# EAGLE board LiPo Drop Charger v.4 -- Dual MCP73831T (EAGLE 6.4)

Size 100 x 80 mm. Coordinates in mm from the lower left corner, seen from the top.
Outline: 0,0 100,0 100,80 0,80 0,0
Copper layers (1*16): Top 0.035mm / dielectric 1.5mm / Bottom 0.035mm
Design rules "default": minimum track width 10mil, minimum drill 24mil, track to track 8mil, track to pad 8mil, pad to pad 8mil, via to via 8mil, smd to smd 8mil, copper to edge 40mil, drill to drill 8mil, minimum pad ring 10mil, minimum via ring 8mil, stop-mask expansion 4mil, vias tented up to drill 0mil, thermal gap 10mil

## Footprints (pad centres in the part's own frame; a part is rotated, then mirrored left to right if it is on the bottom)
1X01 = drill 1.016 pad 1.88: 1 0,0
0805 = smd 0.8 x 1.2: 1 -0.9,0; 2 0.9,0
CHIP-LED0603 = smd 0.8 x 0.8: A 0,-0.75; C 0,0.75
SOT23-3 = smd 0.8 x 0.9: 1 -0.95,-1; 2 0.95,-1; 3 0,1.1
SOT23-5 = smd 0.55 x 1.2: 1 -0.95,-1.3; 2 0,-1.3; 3 0.95,-1.3; 4 0.95,1.3; 5 -0.95,1.3
SOT-23 = smd 1 x 1.27: 1 -0.95,-1; 2 0.95,-1; 3 0,1

## Placement (x,y rotation side)
5V  M01PTH  [1X01]  -19.05,19.05 0 top  (outside the outline)
AI  M01PTH  [1X01]  -27.94,19.05 0 top  (outside the outline)
BAT1+  M01PTH  [1X01]  -40.64,3.81 0 top  (outside the outline)
BAT1-  M01PTH  [1X01]  -29.21,11.43 0 top  (outside the outline)
BAT2+  M01PTH  [1X01]  -20.32,11.43 0 top  (outside the outline)
BAT2-  M01PTH  [1X01]  -38.1,11.43 0 top  (outside the outline)
C1  1uF  [0805]  -15.24,36.83 0 top  (outside the outline)
C2  1uF  [0805]  -19.05,36.83 0 top  (outside the outline)
C3  1uF  [0805]  -22.86,36.83 0 top  (outside the outline)
C4  1uF  [0805]  -26.67,36.83 0 top  (outside the outline)
GND  M01PTH  [1X01]  -36.83,19.05 0 top  (outside the outline)
LED1  [CHIP-LED0603]  -22.86,24.13 0 top  (outside the outline)
LED3  [CHIP-LED0603]  -26.67,24.13 0 top  (outside the outline)
LOAD+  M01PTH  [1X01]  -21.59,3.81 0 top  (outside the outline)
LOAD-  M01PTH  [1X01]  -31.75,3.81 0 top  (outside the outline)
Q1  ZXMN3F30FH  [SOT23-3]  -40.64,24.13 0 top  (outside the outline)
R1  330  [0805]  -30.48,36.83 0 top  (outside the outline)
R2  330  [0805]  -34.29,36.83 0 top  (outside the outline)
R3  4.7  [0805]  -38.1,36.83 0 top  (outside the outline)
R6  100k  [0805]  -41.91,36.83 0 top  (outside the outline)
R8  2K  [0805]  -15.24,40.64 0 top  (outside the outline)
R9  2K  [0805]  -19.05,40.64 0 top  (outside the outline)
R10  1k  [0805]  -22.86,40.64 0 top  (outside the outline)
U1  MCP73831  [SOT23-5]  -31.75,25.4 0 top  (outside the outline)
U2  MCP73831  [SOT23-5]  -35.56,25.4 0 top  (outside the outline)
U$1  DMP1045U  [SOT-23]  13.97,21.59 0 top
U$3  DMP1045U  [SOT-23]  -34.29,33.02 0 top  (outside the outline)
U$4  DMP1045U  [SOT-23]  6.35,34.29 0 top
UCG  M01PTH  [1X01]  -19.05,26.67 0 top  (outside the outline)

## Library data of the parts
5V AI BAT1+ BAT1- BAT2+ BAT2- C1-C4 GND LOAD+ LOAD- Q1 R1-R3 R6 R8-R10 U1 U2 UCG = SparkFun
LED1 LED3 = led
U$1 U$3 U$4 = zak

## Nets
3.7OUT: BAT2-.1 U$1.3
3.7VIN: BAT1+.1 U$1.2 U$3.1 U$4.1 U$4.2
7.4V: BAT2+.1 LOAD+.1 U$3.2
+5V: 5V.1 C3.2 C4.2 LED1.A LED3.A Q1.1 R3.2 R6.1 R10.1 U1.4 U2.4 U$1.1
D: C1.2 C2.2 U1.3 U2.3 U$3.3 U$4.3
GND: C1.1 C2.1 C3.1 C4.1 GND.1 Q1.3 R6.2 R8.1 R9.1 R10.2 U1.2 U2.2 UCG.1
N$2: AI.1 R1.1 R3.1 U1.1
N$3: BAT1-.1 LOAD-.1
N$9: R9.2 U1.5
N$10: LED1.C R1.2
N$11: R8.2 U2.5
N$13: LED3.C R2.2
N$14: R2.1 U2.1

## Tracks (layer width: path | path; a pad name or v marks a point on that pad's centre or on a via)
3.7OUT  (1 unrouted)
3.7VIN  (4 unrouted)
7.4V  (2 unrouted)
+5V  (11 unrouted)
D  (5 unrouted)
GND  (12 unrouted)
N$2  (3 unrouted)
N$3  (1 unrouted)
N$9  (1 unrouted)
N$10  (1 unrouted)
N$11  (1 unrouted)
N$13  (1 unrouted)
N$14  (1 unrouted)